# EAGLE board shackEV_blinken64pp (EAGLE 6.6.0)
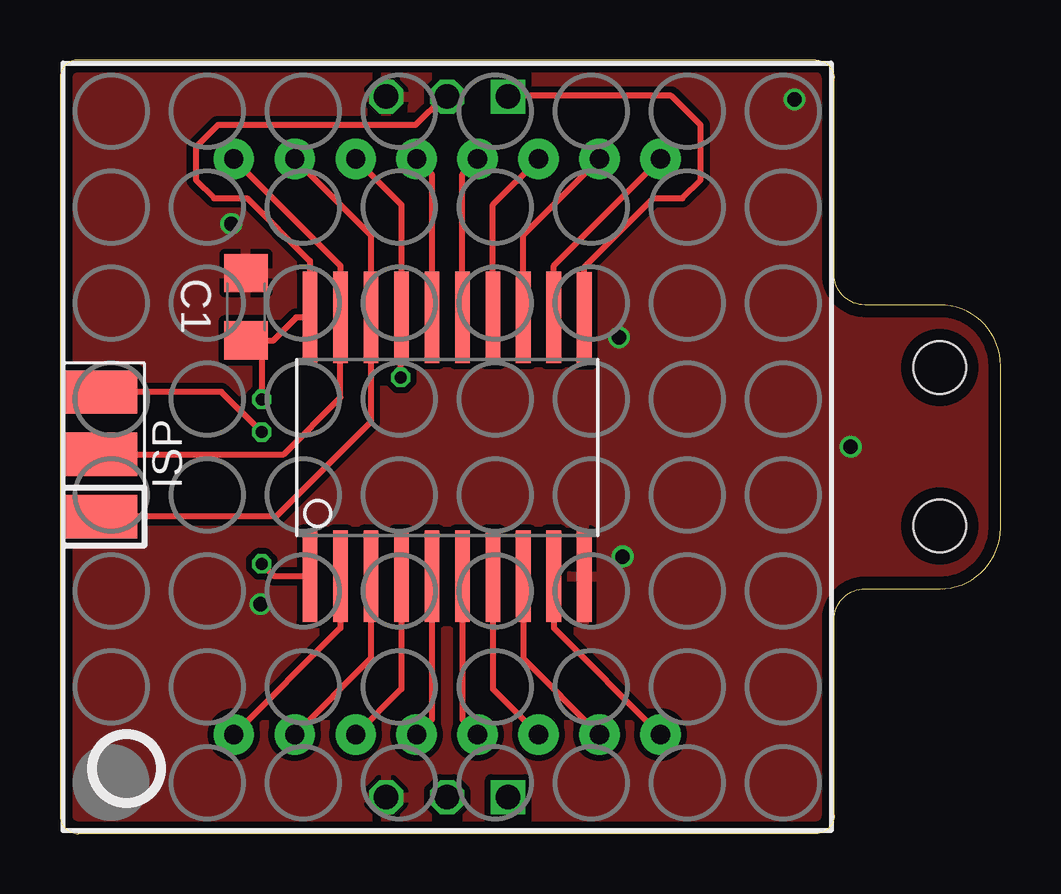
[diagram p0: board, top side]
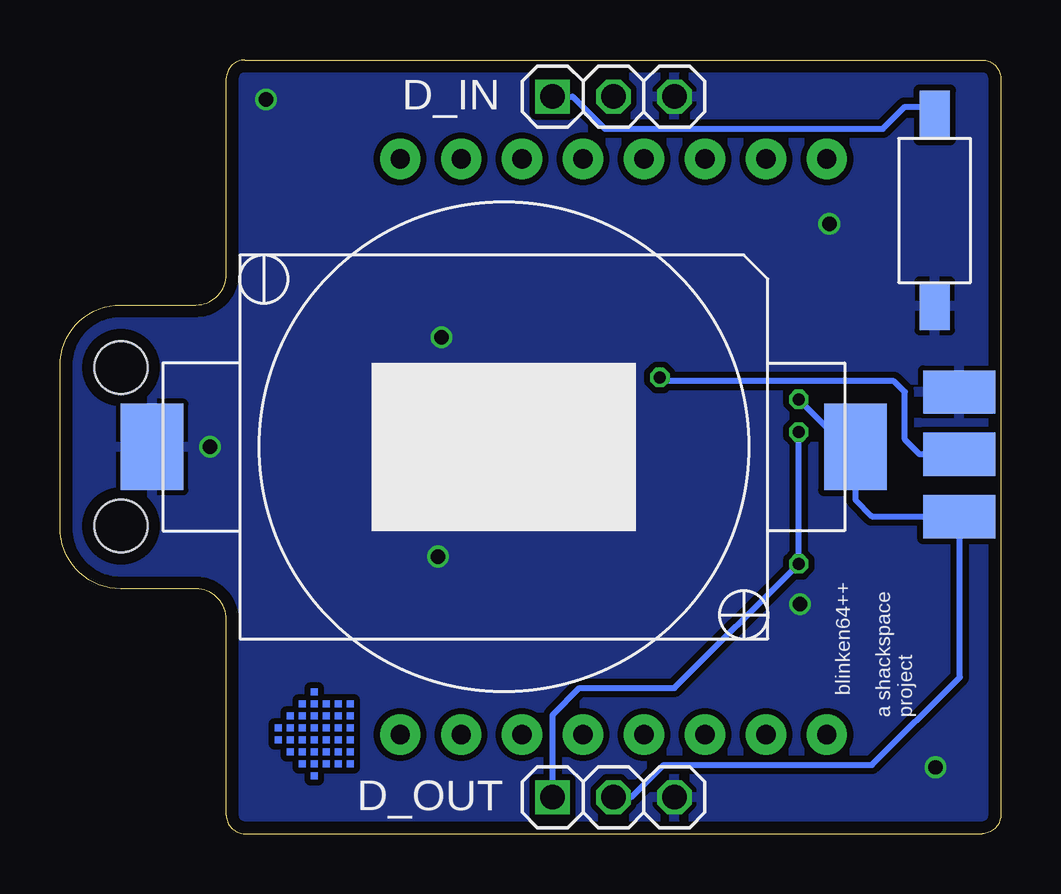
[diagram p1: board, bottom side, seen from below]

Size 39.19 x 32.26 mm. Coordinates in mm from the lower left corner, seen from the top.
Outline: 0,31.5 0,0.76 arc90 0.76,0 31.5,0 arc90 32.26,0.76 32.26,8.94 arc-90 33.53,10.21 36.65,10.21 arc90 39.19,12.75 39.19,19.51 arc90 36.65,22.05 33.53,22.05 arc-90 32.26,23.32 32.26,31.5 arc90 31.5,32.26 0.76,32.26 arc90 0,31.5
Copper layers (1*16): Top 0.035mm / dielectric 1.5mm / Bottom 0.035mm
Design rules "multi-cb_035um-cu": minimum track width 6mil, minimum drill 12mil, track to track 6mil, track to pad 6mil, pad to pad 6mil, via to via 6mil, smd to smd 6mil, copper to edge 20mil, drill to drill 8mil, minimum pad ring 8mil, minimum via ring 6mil, stop-mask expansion 3mil, vias tented up to drill 0mil, thermal gap 8mil
Holes 2.2 mm at 36.65,12.83 36.65,19.43

## Footprints (pad centres in the part's own frame; a part is rotated, then mirrored left to right if it is on the bottom)
KZH20SMD = smd 2.6 x 3.6: + 14.65,0; - -14.65,0
C1206 = smd 1.6 x 1.8: 1 -1.4,0; 2 1.4,0
1X03-S = drill 1.016 square: 1 -2.54,0 | drill 1.016 octagon: 2 0,0; 3 2.54,0
SMD = smd 3 x 1.8 bottom: GND 1.5,-6.1; MOSI 1.5,-3.5; VCC 1.5,-0.9 | smd 3 x 1.8: MISO 1.5,-0.9; RESET 1.5,-6.1; SCK 1.5,-3.5
MICROBUILDER_SEGMENT_BL-M12A881UR = drill 0.8 pad 1.676: 1 -8.89,-12; 2 -6.35,-12; 3 -3.81,-12; 4 -1.27,-12; 5 1.27,-12; 6 3.81,-12; 7 6.35,-12; 8 8.89,-12; 9 8.89,12; 10 6.35,12; 11 3.81,12; 12 1.27,12; 13 -1.27,12; 14 -3.81,12; 15 -6.35,12; 16 -8.89,12
2P-SWITCH-GENERAL = smd 2.032 x 1.27: P$1 -0.981,1.5; P$2 6.979,1.5
SO20L$ = smd 0.61 x 3.81: 1 -5.715,-5.397; 2 -4.445,-5.397; 3 -3.175,-5.397; 4 -1.905,-5.397; 5 -0.635,-5.397; 6 0.635,-5.397; 7 1.905,-5.397; 8 3.175,-5.397; 9 4.445,-5.397; 10 5.715,-5.397; 11 5.715,5.372; 12 4.445,5.397; 13 3.175,5.397; 14 1.905,5.397; 15 0.635,5.397; 16 -0.635,5.397; 17 -1.905,5.397; 18 -3.175,5.397; 19 -4.445,5.397; 20 -5.715,5.397

## Placement (x,y rotation side)
BATTERY_1  2032  [KZH20SMD]  20.7,16.13 0 bottom
C1  [C1206]  7.75,21.97 90 top
D_IN  [1X03-S]  16.13,30.73 0 bottom
D_OUT  [1X03-S]  16.13,1.52 0 bottom
ISP1  SMD-ISP  [SMD]  3.23,12.32 180 top
LED2  [MICROBUILDER_SEGMENT_BL-M12A881UR]  16.13,16.13 0 top
SW1  SWITCH-2PSWITCH-GENERAL-2P  [2P-SWITCH-GENERAL]  1.24,22.99 90 bottom
U$2  TINY2313-*S*  [SO20L$]  16.13,16.13 0 top

## Library data of the parts
BATTERY_1 = kzh20_lithium_batterie_holder
C1 = resistor
D_IN D_OUT = pinhead-2
ISP1 = f0086
LED2 = Adafruit 1.2inch 8x8 backpack
SW1 = edragon_switch
U$2 = avr-6

## Nets
1: LED2.1 U$2.2
2: LED2.2 U$2.3
3: LED2.3 U$2.4
4: LED2.4 U$2.5
5: LED2.5 U$2.6
6: LED2.6 U$2.7
7: LED2.7 U$2.8
8: LED2.8 U$2.9
9: LED2.9 U$2.12
10: LED2.10 U$2.13
11: LED2.11 U$2.14
12: LED2.12 U$2.15
13: LED2.13 U$2.16
14: ISP1.MOSI LED2.14 U$2.17
15: ISP1.MISO LED2.15 U$2.18
16: ISP1.SCK LED2.16 U$2.19
BTN: D_IN.1 SW1.P$2 U$2.11
DOUT: D_OUT.1 ISP1.RESET U$2.1
GND: BATTERY_1.- C1.2 D_IN.3 D_OUT.3 ISP1.GND SW1.P$1 U$2.10
VCC: BATTERY_1.+ C1.1 D_IN.2 D_OUT.2 ISP1.VCC U$2.20

## Tracks (layer width: path | path; a pad name or v marks a point on that pad's centre or on a via)
1
  Top 0.254: U$2.2 11.68,8.57 LED2.1
2
  Top 0.254: U$2.3 12.95,7.3 LED2.2
3
  Top 0.254: U$2.4 14.22,6.03 LED2.3
4
  Top 0.254: U$2.5 15.49,4.76 LED2.4
5
  Top 0.254: U$2.6 16.76,4.76 LED2.5
6
  Top 0.254: U$2.7 18.03,6.03 LED2.6
7
  Top 0.254: U$2.8 19.3,7.3 LED2.7
8
  Top 0.254: U$2.9 20.57,8.57 LED2.8
9
  Top 0.254: U$2.12 20.57,23.68 LED2.9
10
  Top 0.254: U$2.13 19.3,24.95 LED2.10
11
  Top 0.254: U$2.14 18.03,26.22 LED2.11
12
  Top 0.254: U$2.15 16.76,27.49 LED2.12
13
  Top 0.254: LED2.13 15.49,27.49 U$2.16
14  (via drill 0.5)
  Top 0.254: LED2.14 14.22,26.22 U$2.17 14.2,21.5 v14.2,19.03
  Bottom 0.254: ISP1.MOSI 3.37,15.82 3.99,16.43 3.99,18.41 4.45,18.87 14.05,18.87 v14.2,19.03
15
  Top 0.254: LED2.15 12.95,24.95 U$2.18 12.95,17.17 9.02,13.23 1.74,13.23 ISP1.MISO
16
  Top 0.254: LED2.16 11.68,23.68 U$2.19 11.68,18.19 9.32,15.82 ISP1.SCK
BTN
  Top 0.254: U$2.11 21.84,23.62 24.71,26.49 25.93,26.49 26.7,27.25 26.7,29.54 25.48,30.76 18.69,30.76 D_IN.1
  Bottom 0.254: D_IN.1 17.83,30.73 16.48,29.39 4.9,29.39 3.99,30.3 3.08,30.3 SW1.P$2
DOUT  (via drill 0.5)
  Top 0.254: U$2.1 8.93,10.73 v8.41,11.25 | v8.41,16.74 6.73,18.42 ISP1.RESET
  Bottom 0.254: v8.41,16.74 v8.41,11.25 13.59,6.07 17.55,6.07 18.67,4.95 D_OUT.1
GND  (via drill 0.6)
  other vias: 32.94,16.13 23.44,11.56 2.72,2.77 23.29,20.7 8.36,9.58 30.61,30.61 7.14,25.43
  pour Bottom (isolate 0.254): 57.12,34.01 -15.32,31.55 -15.82,-1.47 52.96,0.13
  pour Top (isolate 0.254): 52.45,-1.45 48.34,35.38 -9.17,33.35 -4.85,-1.19
VCC  (via drill 0.5)
  Top 0.254: 7.77,20.55 8.87,20.55 9.84,21.53 U$2.20 10.41,23.88 7.8,26.49 6.43,26.49 5.66,27.25 5.66,28.63 6.58,29.54 14.81,29.54 16,30.73 D_IN.2 | 7.77,20.55 C1.1 | 7.77,20.55 8.41,19.91 v8.41,18.11
  Bottom 0.254: D_OUT.2 15.39,1.52 14.05,2.87 5.36,2.87 1.7,6.53 1.7,13.2 ISP1.VCC 1.74,13.23 5.36,13.23 6.05,13.93 BATTERY_1.+ 6.43,16.13 v8.41,18.11
(copper drawn outside any net)
  shapes: Bottom area x38

## Text on the board
bNames: blinken64++ | a shackspace / project